# Altium PCB PCB1.PcbDoc
Units mil, origin at the board's own origin, x right, y up, seen from the top; angles counter-clockwise.
Board outline 1000 x 620 mil, 2 copper layers (Top Layer, Bottom Layer); 15 components, 14 nets, 57 pads, 25 vias.
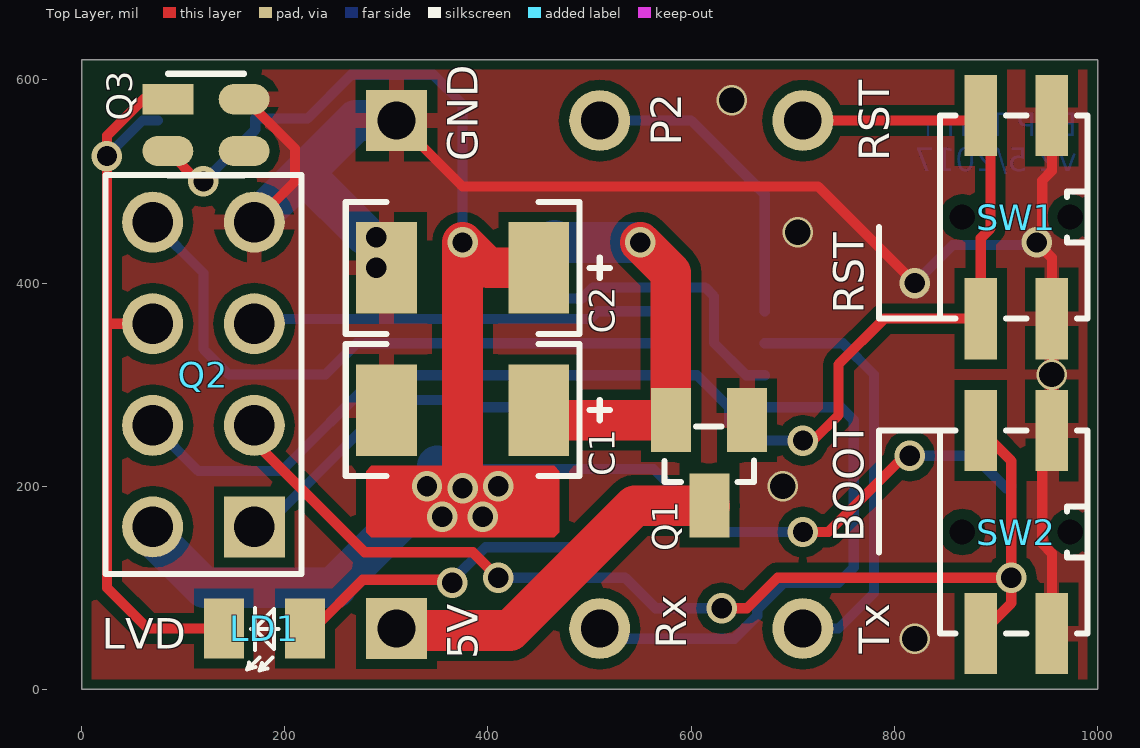
[diagram p0: Top Layer view]
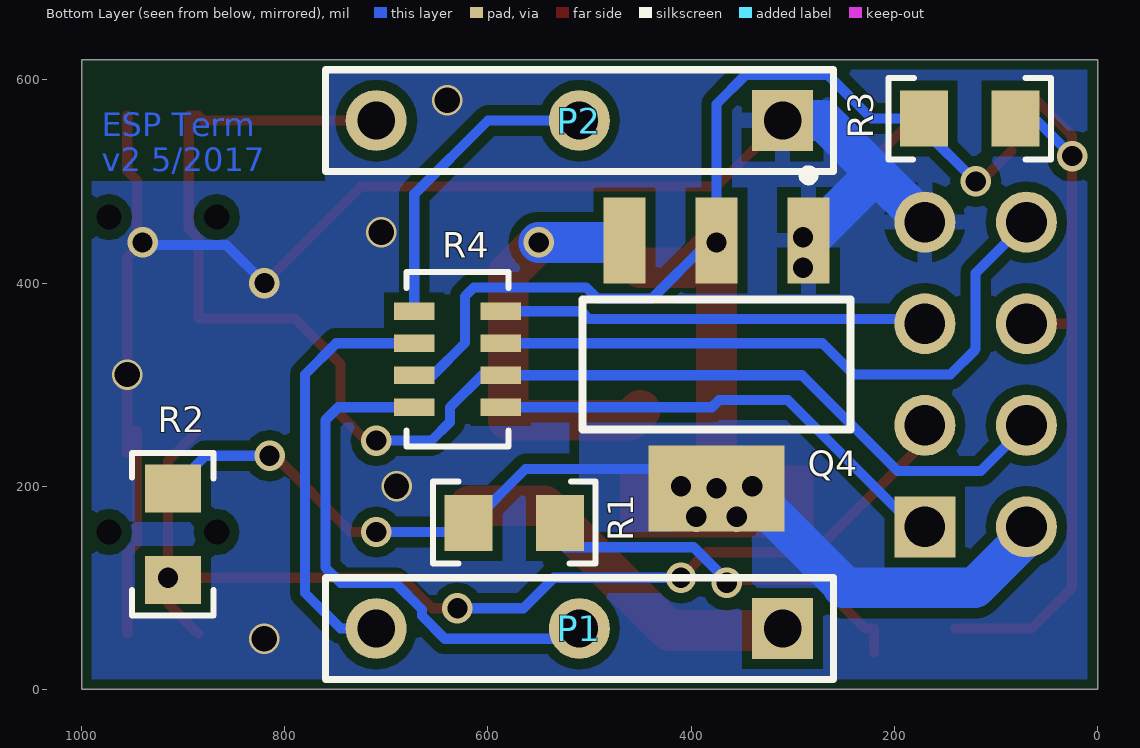
[diagram p1: Bottom Layer view, seen from below]

## Layer stack, top to bottom
Top Solder: solder mask 0.4, Solder Resist, Dk 3.5
Top Layer: signal copper 1.4
Dielectric 1: dielectric 12.6, FR-4, Dk 4.8
Bottom Layer: signal copper 1.4
Bottom Solder: solder mask 0.4, Solder Resist, Dk 3.5

## Board outline
0,0 1000,0 1000,620 0,620

## Design rules (kind name [scope] priority, off if disabled: settings)
Clearance [All] p1: gap=10
HoleSize [All] p1: absolutevalues=TRUE maxlimit=100 minlimit=15 maxpercent=80.000 minpercent=20.000
PolygonConnect PolygonConnect_2 [InNet('GND') vs IsVia] p1: connectstyle=Direct reliefconductorwidth=10 reliefentries=4 polygonreliefangle="90 Angle" airgapwidth=10
PolygonConnect PolygonConnect_1 [(InNet('3V3') AND InComponent('Q4'))] p2: connectstyle=Direct reliefconductorwidth=10 reliefentries=4 polygonreliefangle="90 Angle" airgapwidth=10 // heatsink connect
PolygonConnect [All] p3: connectstyle=Relief reliefconductorwidth=15 reliefentries=4 polygonreliefangle="90 Angle" airgapwidth=10
RoutingVias [All] p1: holewidth=20 width=30 viastyle="Through Hole" minholewidth=16 minwidth=20 maxholewidth=28 maxwidth=50
SolderMaskExpansion [All] p1: expansion=4
Width [All] p1: maxlimit=60 minlimit=8 preferedwidth=10
29 further rules are at their usual default settings.

## Components (designator, comment, footprint, x,y, rotation, side; value= is the part's Value field where it differs from the comment)
C1 "47u" CPol_B 375,275 r180 top
C2 "47u" CPol_B 375,415 r180 top
LD1 "RED" LED_SMD 180,60 r180 top
P1 "Header 3" PIN_1x3_SPARSE 510,60 r0 bottom
P2 "Header 3" PIN_1x3_SPARSE 510,560 r0 bottom
Q1 "IRLM6402" SOT23 655,265 r180 top
Q2 "ESP-01" ESP_01 120,310 r90 top
Q3 "NCP305" SC-82 85,581 r0 top
Q4 "LD1117A" SOT-223/DSO-G3/D6.7 375,320 r0 bottom
R1 "1k" R0805 574,164 r0 bottom
R2 "10k" R0805 910,153 r270 bottom
R3 "10k" R0805 126,562 r180 bottom
R4 "470R" R1206_Array_longpad 630,325 r90 bottom
SW1 "SW" TURTLE_BTN 920,465 r90 top
SW2 "SW" TURTLE_BTN 920,155 r90 top

## Footprints (in the part's own frame and the unit in brackets; to place one, negate y for a bottom-side part, rotate by r counter-clockwise, add the part's x,y. Pads: shape width x height; smd on the part's side, far side on the other; paste and mask are expansions set on the pad)
CPol_B [mil] "TAJ polarized capacitor \"B\""
  rect 60x90 smd: 1(-75,0) 2(75,0)
  silkscreen extent -145,-65 115,65, body extent -71,-55 71,55, height 76
ESP_01 [mil] "Header 2Row 4Way 2.54mm"
  rect 60x60 hole 40: 1(-150,-50)
  round 60 hole 40: 2(-150,50) 3(-50,-50) 4(-50,50) 5(50,-50) 6(50,50) 7(150,-50) 8(150,50)
  silkscreen extent -196,-97 196,97, body extent -285,-860 285,110, height 433
LED_SMD [mm]
  rect 1x1.5 smd: A(-1.016,0) C(1.016,0)
  silkscreen extent -0.36,-0.51 0.43,1.05, body extent -1.05,-0.45 1.02,0.45, height 0.85
PIN_1x3_SPARSE [mil] "Header 1Row 5Way 2.54mm"
  rect 60x60 hole 37: 1(-200,0)
  round 60 hole 37: 2(0,0) 3(200,0)
  silkscreen extent -250,-50 250,50, body extent -250,-50 250,50, height 400
R0805 [mm]
  rect 1.2x1.4 smd: 1(-1.143,0) 2(1.143,0)
  silkscreen extent -2.03,-1.03 2.03,1.02, body extent -1,-0.63 1,0.63, height 0.5
R1206_Array_longpad [mil] "1206 4x resistor array"
  rect 17x40 smd: 1(-47.24,-42.48) 2(-47.24,42.48) 3(-15.75,-42.48) 4(-15.75,42.48) 5(15.75,-42.48) 6(15.75,42.48) 7(47.24,-42.48) 8(47.24,42.48)
  silkscreen extent -86,-50 86,50, body extent -63,-31 63,31, height 20
SC-82 [mil]
  rect 50x30 smd: 1(0,0)
  oval 50x30 smd: 2(0,-51) 3(75,-51) 4(75,0)
  silkscreen extent 0,-75 75,25, body extent 0,-75 75,25, height 43
SOT23 [mm]
  rect 1x1.6 smd: 1(0,0) 2(1.905,0) 3(0.94,2.134)
  silkscreen extent -0.18,0.15 2.06,1.55, body extent -0.48,-0.31 2.44,2.24, height 0.94
SOT-223/DSO-G3/D6.7 [mm] "SOT-223/SC-73; 4 Leads; Body 6.7 x 7.3 mm, inc. leads (LxW max)"
  rect 1.05x2.15 smd: 1(-2.3,-3.1) 2(0,-3.1) 3(2.3,-3.1)
  rect 3.4x2.15 smd: 4(0,3.1)
  silkscreen extent -3.35,-4.85 3.35,1.63, body extent -3.25,-3.5 3.25,3.5, height 1.64
TURTLE_BTN [mil] "Side push 4-pad turle type button"
  rect 80x32 smd: 1(-100,-35) 1(100,-35) 2(-100,35) 2(100,35)
  round 22 hole 25 unplated: 5(0,53) 5(0,-53)
  silkscreen extent -100,-70 100,75, body extent -92,-105 93,71, height 63

## Part data
C1 C2: library part C_EL
LD1: library part LED
P1 P2: "Header, 3-Pin"
Q1: library part BSS84, "P-Channel Enhancement Mode Vertical DMOS FET"
Q2: library part ESP_01, "ESP-01 in socket"
Q3: "Voltage Watchdog"
Q4: "Low drop fixed and adjustable positive voltage regulators"
R1 R2 R3: library part R
R4: library part R_ARRAY
SW1 SW2: library part SW_SPST_4PAD

## Via types
v1: diameter 30, hole 20, Top Layer to Bottom Layer, tented both sides, 11 vias
v2: diameter 30, hole 20, Top Layer to Bottom Layer, 7 vias
v3: diameter 30, hole 25, Top Layer to Bottom Layer, tented both sides, 5 vias
v4: diameter 30, hole 20, Top Layer to Bottom Layer, tented top, 2 vias

## Nets (pads, with @x,y where several pads share a name; then routed paths per layer and width w, separated by ;. In a path a pad name is that pad's centre, name@x,y a point inside that pad or via, vN(x,y) a via of type N, cw(c..) or ccw(c..) an arc to the next point about the centre after c; other vN are vias at no path point)
3V3: C2.1 Q2.2 Q3.2 Q4.2 Q4.4 R1.2 R2.1 R3.1 R4.4 | length 2233.6
  Top Layer w10: Q3.2 115,500 v1(120,500) ; v1(710,155) 735,155 810,230 v1(815,230)
  Top Layer w40: v2(375,197.95) v4(375,440) 400,415 C2.1
  Bottom Layer w10: v1(120,500) 171,551 R3.1@171,560 ; R3.1 222.5,562 265.5,605 346.21,605 375,576.21 Q4.2 v4(375,440) 383.39,440 438.67,384.72 492.43,384.72 503.45,395.74 613.73,395.74 622.52,386.96 622.52,341 654.26,309.25 R4.4 ; Q4.4@375,225 v2(375,197.95) 394.05,217 563,217 R1.2@617.5,162.5 ; R1.2 628,155 v1(710,155) ; v1(815,230) 878,230 R2.1 ; R2.1@913.5,201.5 R2.1@915,200
  Bottom Layer w40: Q2.2 70,151 121,100 250,100 250,102.43 Q4.4@345.53,197.95 ; Q4.4@350,220 Q4.4@372.05,197.95
  other v2: 355,170 395,170 340,200 410,200
5V: P1.1 Q1.3 | length 359.8
  Top Layer w40: P1.1 312,58 421.64,58 544.64,181 Q1.3
CHPD: LD1.C Q2.6 Q3.1 R3.2 | length 759.6
  Top Layer w10: Q2.6 25,360 ; Q3.1@83.57,581 61,581 25,545 v1(25,525) 25,360 ; LD1.C 65,60 25,100 25,360
  Bottom Layer w10: v1(25,525) 60,560 R3.2@75,560
GND: C1.2 C2.2 P2.1 Q1.1 Q2.7 Q3.4 Q4.1 SW1.1 SW2.1 | length 1727.8
  Top Layer w10: Q3.4 161.43,581 210,532.43 210,500 Q2.7 ; v2(290,445) 295,445 C2.2@300,440 ; P2.1 375,495 725,495 v1(820,400) ; v1(940,440) 955,425 955,365 v3(955,310) 955,255 955,233 953,235 SW2.1@953,255 ; v1@945.5,453.61 945.5,501 955,510.5 SW1.1@955,565 ; SW2.1@950.25,250.25 945.5,255 945.5,143.61 955,134.11 SW2.1@955,55
  Bottom Layer w10: Q4.1@284,411 285,412 Q4.1@285,425 ; v1(820,400) 857.5,437.5 937.5,437.5 v1(940,440)
  Bottom Layer w40: Q2.7 220,510 ; Q4.1@278.25,448.25 220,506.5 220,510 ; P2.1 270,560 220,510
  other v2: 290,415
  other v3: 820,50 690,200 705,450 640,580
GPIO0: Q2.3 R2.2 SW2.2 | length 1066.3
  Top Layer w10: Q2.3 170,243.79 278.79,135 385,135 v1(410,110) ; v1(630,80) 655,80 685,110 v4(915,110) ; SW2.2@885,55 915,85 v4(915,110) ; SW2.2@885,255 915,225 v4(915,110)
  Bottom Layer w10: v1(410,110) 535,110 565,80 v1(630,80)
GPIO2: Q2.5 R4.7 | length 422.6
  Bottom Layer w10: Q2.5 174.72,364.72 500.72,364.72 508.24,372.24 R4.7
NetC1_1: C1.1 Q1.2 Q4.3 | length 406.9
  Top Layer w40: C1.1 460,265 Q1.2 580,410 v1(550,440)
  Bottom Layer w40: Q4.3 467.6,440 v1(550,440)
NetLD1_A: LD1.A R1.1 | length 383.4
  Top Layer w10: LD1.A@220,36 LD1.A 228.79,60 276.79,108 362,108 v1(365,105)
  Bottom Layer w10: v1(365,105) 365,107.43 397.57,140 524,140 R1.1@537,153
NetP1_2: P1.2 R4.2 | length 524.5
  Bottom Layer w10: P1.2 520,50 642.43,50 665,72.57 665,78.64 691.36,105 745,105 760,120 760,265 747.24,277.76 R4.2
NetP1_3: P1.3 R4.6 | length 419.8
  Bottom Layer w10: R4.6 749.25,340.75 780,310 780,95 745,60 P1.3
NetP2_2: P2.2 R4.8 | length 307.8
  Bottom Layer w10: P2.2 600,560 672.48,487.52 R4.8
RST: P2.3 Q2.4 R4.3 SW1.2 | length 1377.3
  Top Layer w10: v1(710,245) 720,245 745,270 745,320 790,365 885,365 885,444.11 894.5,453.61 894.5,565 885,565 880,560 P2.3
  Bottom Layer w10: Q2.4 115,215 196.72,215 290.97,309.25 R4.3 605.74,309.25 637.48,277.51 637.48,263.04 655.52,245 v1(710,245)
RX: Q2.1 R4.1 | length 472.3
  Bottom Layer w10: Q2.1 180,160 305,285 372.43,285 379.67,277.76 R4.1
TX: Q2.8 R4.5 | length 636.3
  Bottom Layer w10: Q2.8 120,410 120,335 145,310 240,310 270.75,340.75 R4.5
pads on no net: Q3.3 SW1.5 SW2.5

## Polygon pours and split planes (outlines as drawn)
3V3 on Bottom Layer "HEATSINK" (solid, pour order 0): 450,265 305,265 300,265 210,175 210,100 335,100 340,105 340,145 345,150 350,155 505,155 510,160 510,265
GND on Bottom Layer "GND_BOT" (solid, pour order 2): 10,610 10,10 990,10 990,610 10,610
GND on Top Layer "GND_TOP" (solid, pour order 4): 10,610 10,10 990,10 990,610

## Other copper
Top Layer:
  region net 3V3: 465,220 470,215 470,155 465,150 285,150 280,155 280,215 285,220
Bottom Layer:
  text "ESP Term / v2 5/2017" at 980,510 h23

## Silkscreen, mask and mechanical layers (free items; w line width, h text height)
Top Overlay:
  lines w6: 785,135 785,255 845,255 ; 785,455 785,365 845,365
  text "P2" at 590,535 h30 r90
  text "GND" at 390,520 h30 r90
  text "RST" at 795,520 h30 r90
  text "RST" at 770,370 h30 r90
  text "BOOT" at 770,145 h30 r90
  text "LVD" at 20,40 h30
  text "Rx" at 595,40 h30 r90
  text "Tx" at 795,35 h30 r90
  text "5V" at 390,30 h30 r90
Bottom Solder:
  region: 770,595 770,505 980,505 980,595
Mechanical 1:
  lines w6: 0,0 0,620 995,620 1000,620 1000,0 0,0